# Altium PCB PCB1.PcbDoc
Units mil, origin at the board's own origin, x right, y up, seen from the top; angles counter-clockwise.
Board outline 2850 x 3370 mil, 2 copper layers (Top Layer, Bottom Layer); 20 components, 14 nets, 84 pads, 4 vias.
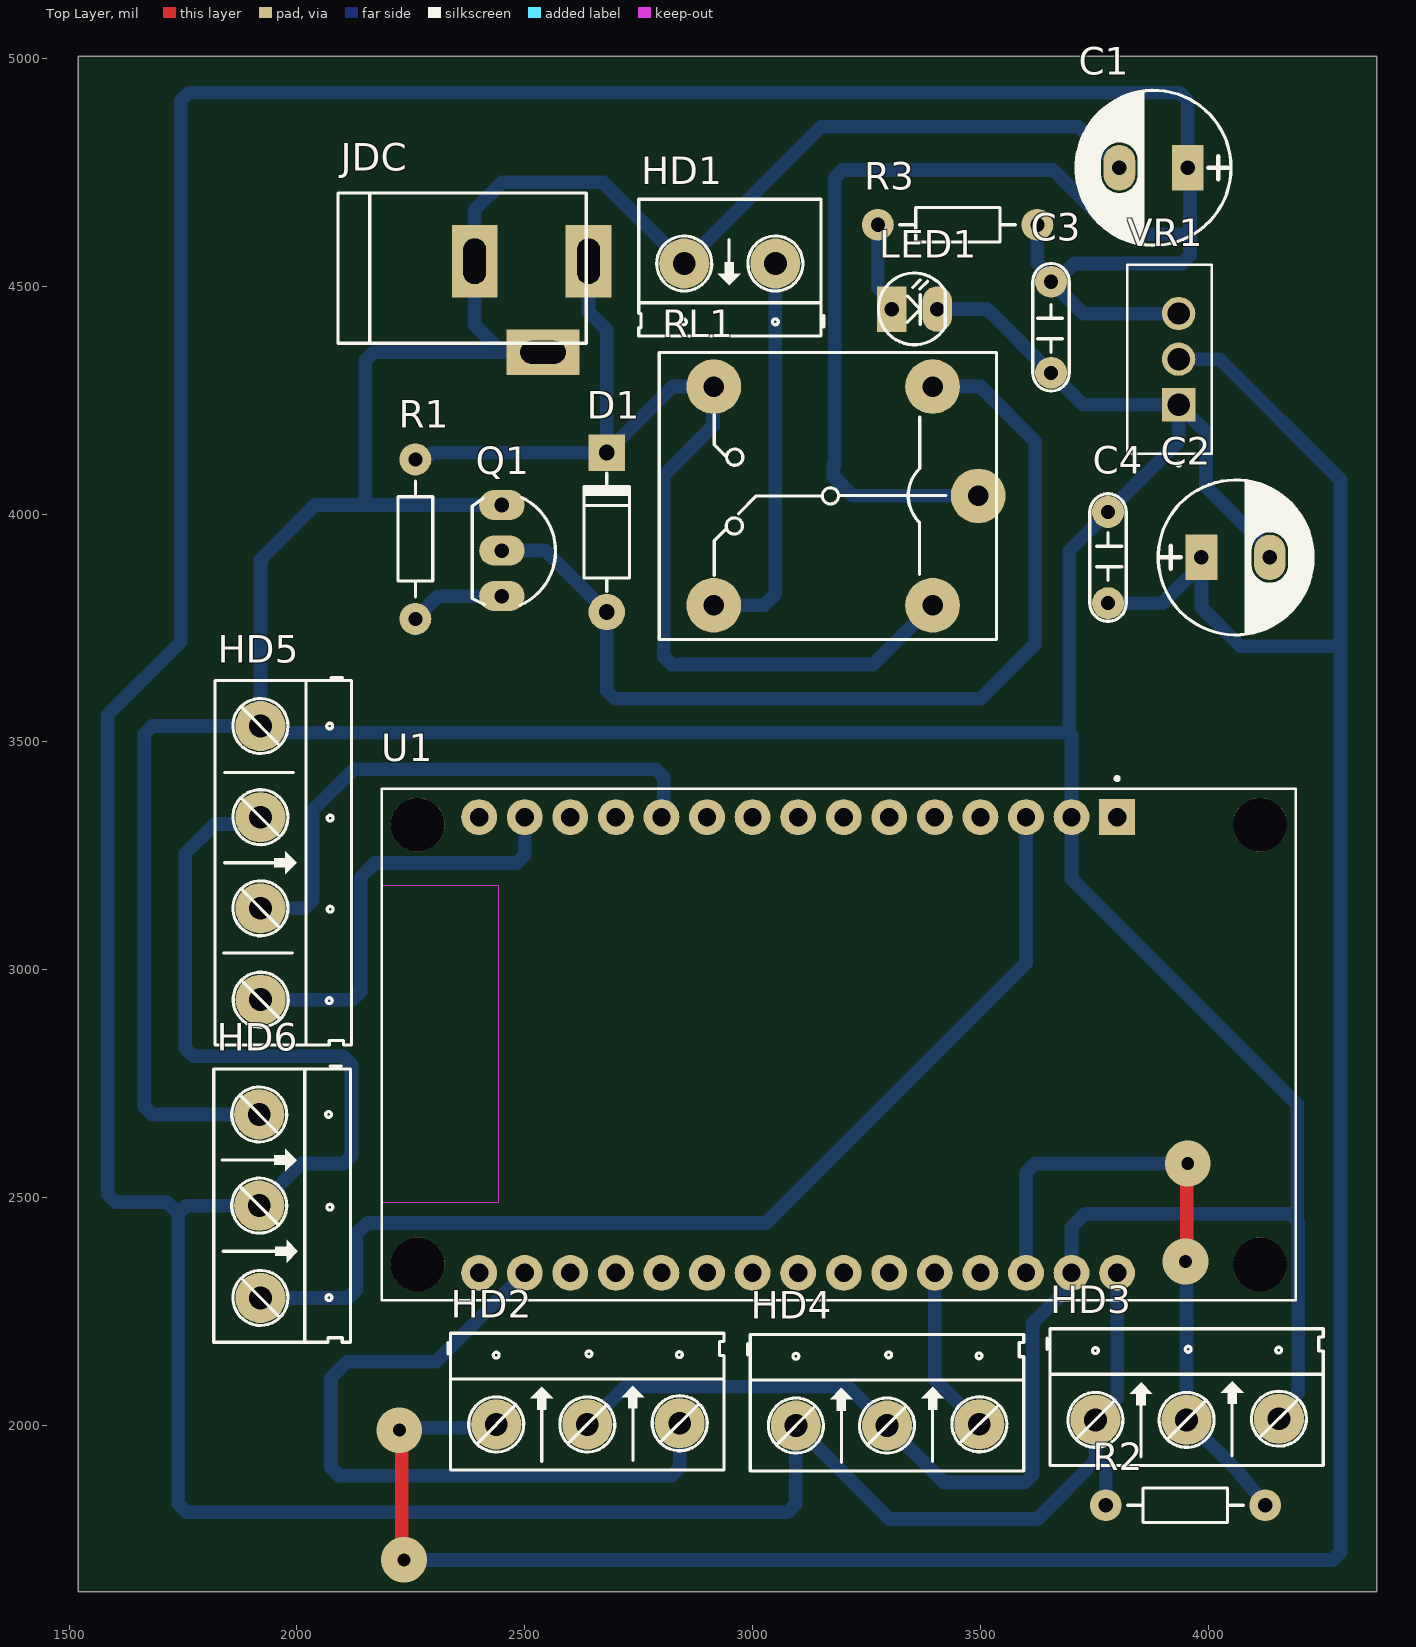
[diagram p0: Top Layer view]
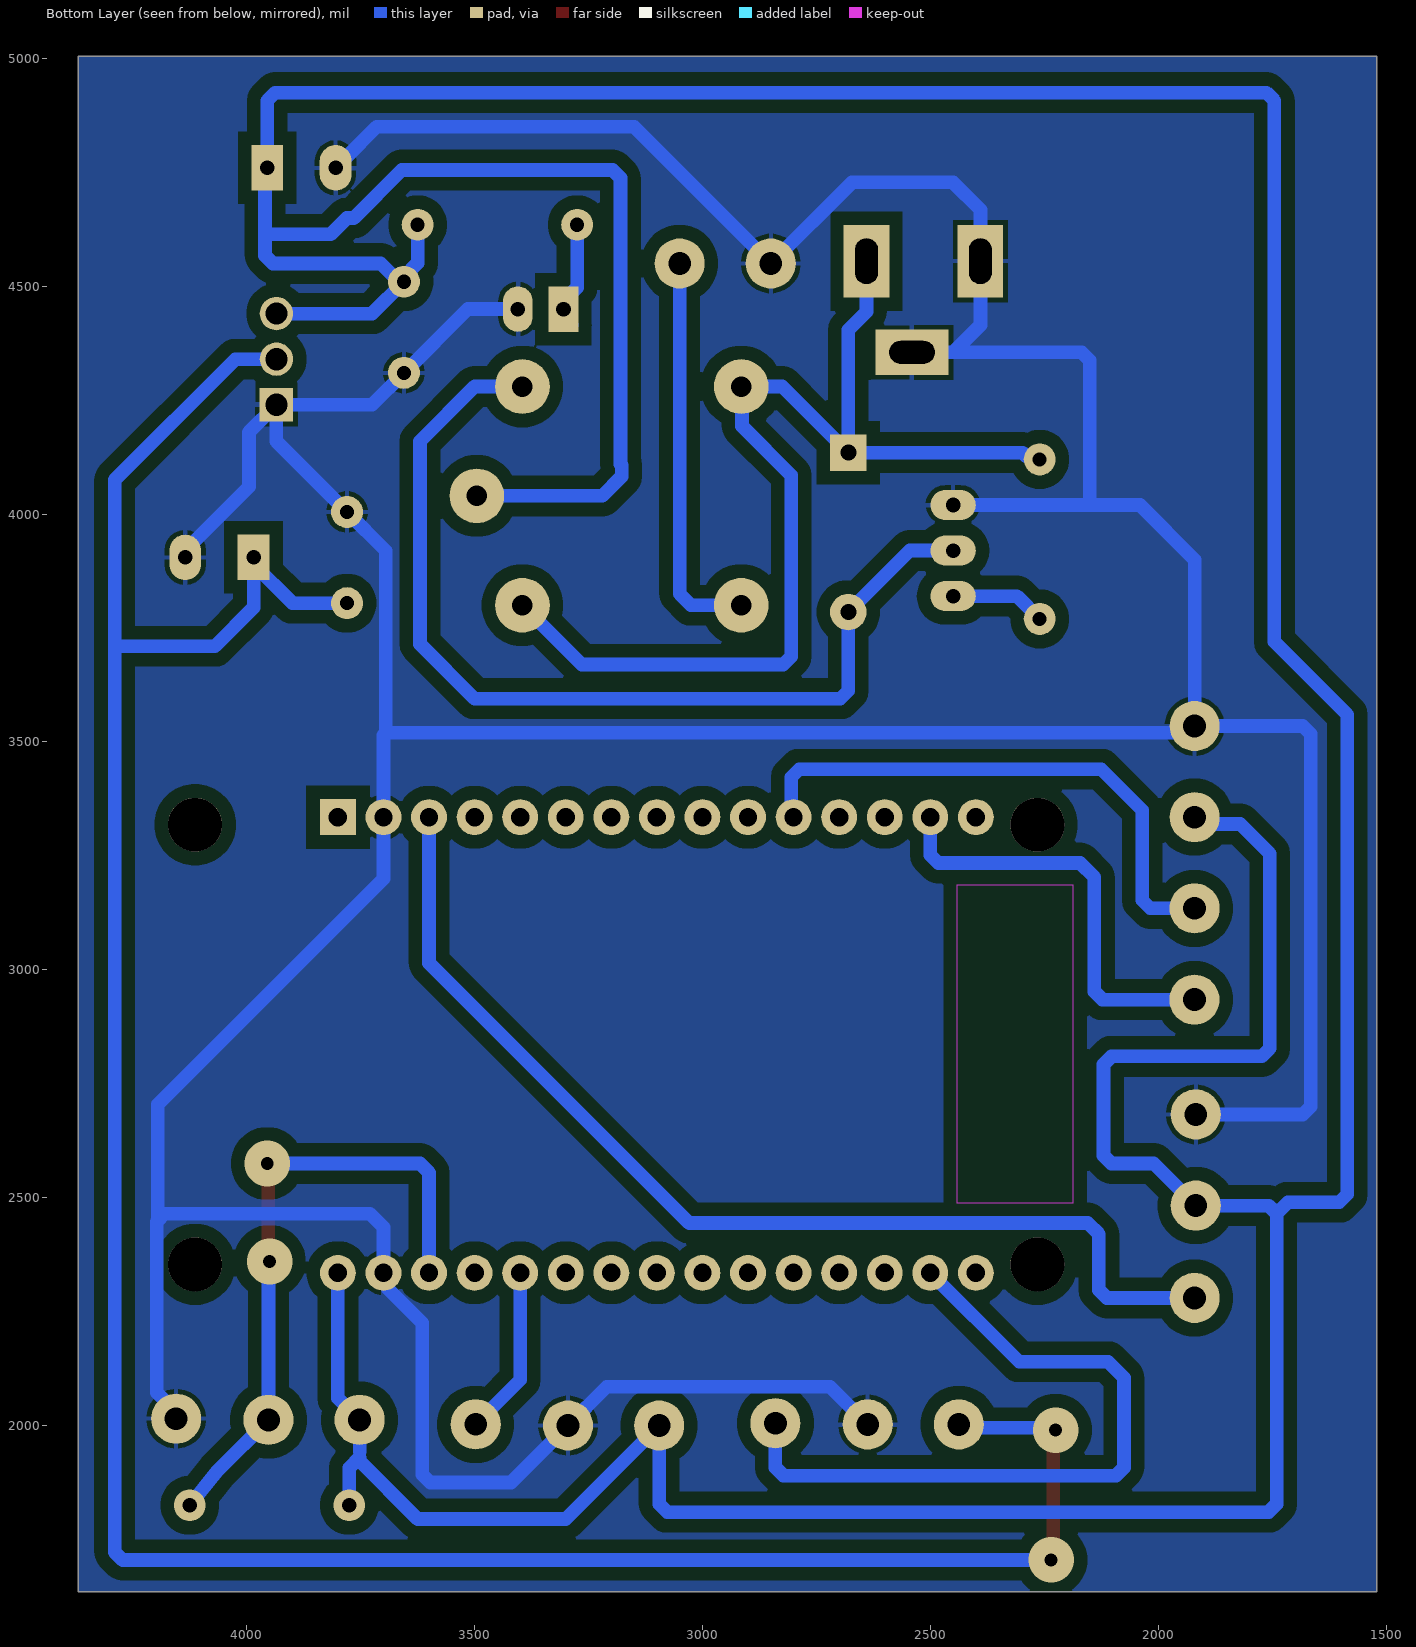
[diagram p1: Bottom Layer view, seen from below]
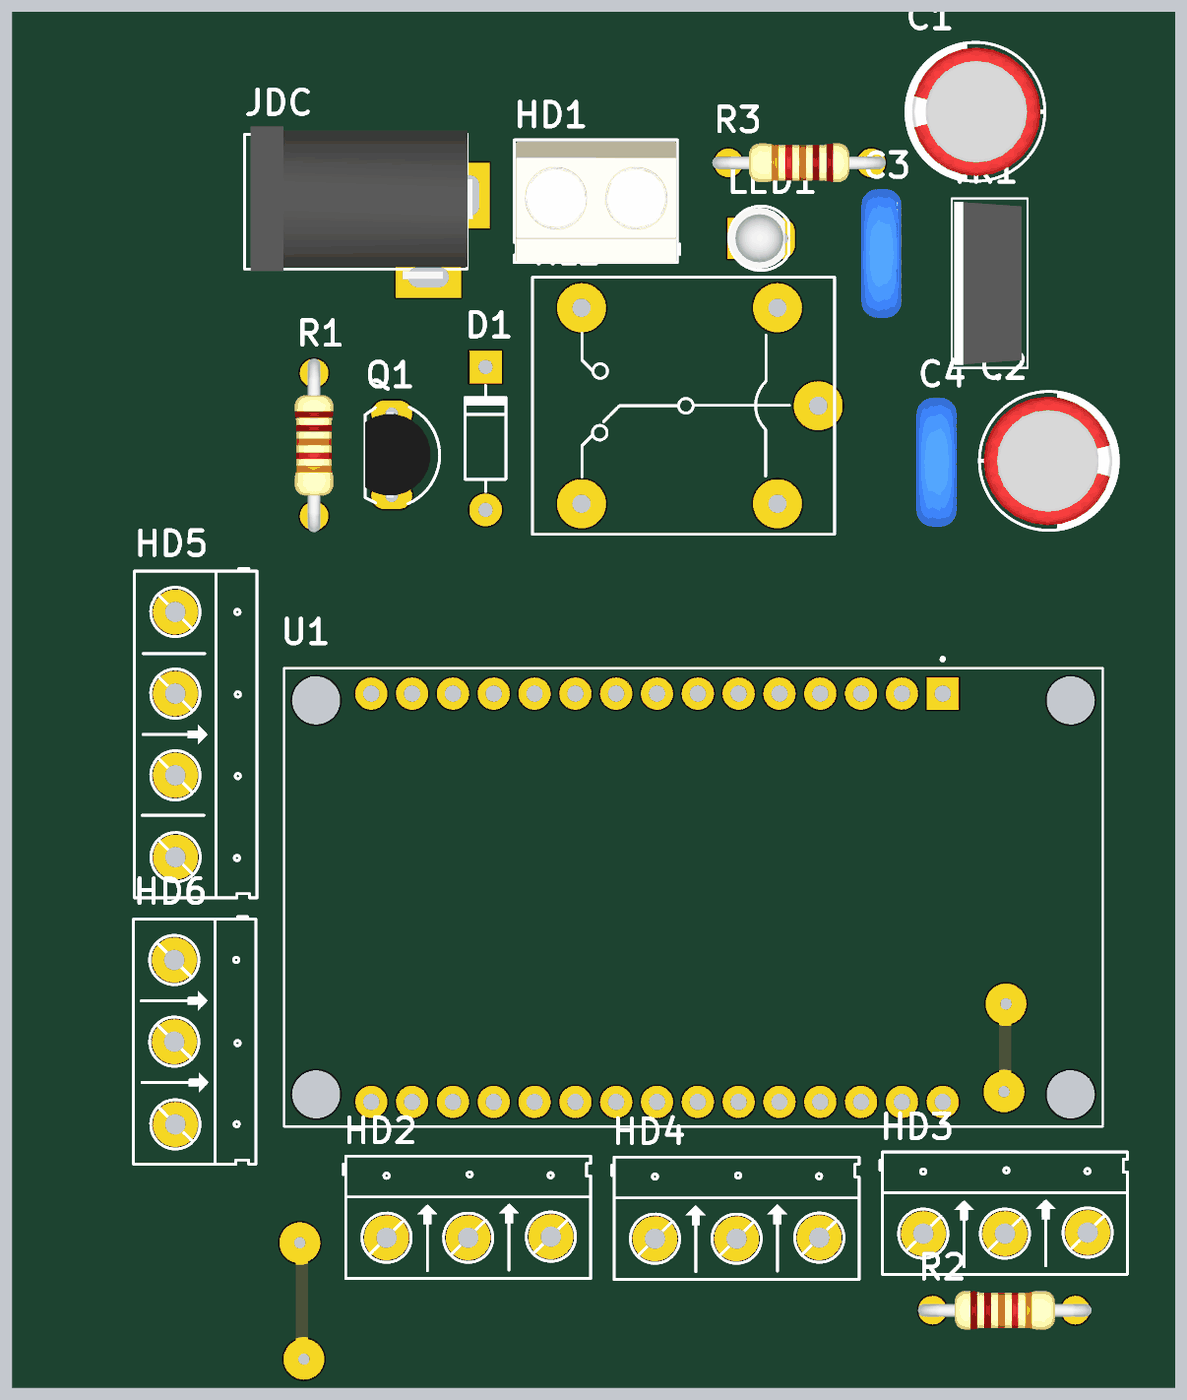
[diagram p2: 3D render of the assembled board from above, using the file's embedded part models]

## Layer stack, top to bottom
Top Solder: solder mask 0.4, Solder Resist, Dk 3.5
Top Layer: signal copper 1.4
Dielectric 1: dielectric 12.6, FR-4, Dk 4.8
Bottom Layer: signal copper 1.4
Bottom Solder: solder mask 0.4, Solder Resist, Dk 3.5

## Board outline
1520,1635 4370,1635 4370,5005 1520,5005

## Design rules (kind name [scope] priority, off if disabled: settings)
Clearance [All] p1: gap=10 ignorepadtopadclearanceinfootprint=FALSE except(0: Arc-Hole Track-Hole SMDPad-Hole THPad-Hole Via-Hole Fill-Hole Poly-Hole Region-Hole Text-Hole; 30: Arc-Fill Arc-Poly Arc-Region Track-Fill Track-Poly Track-Region SMDPad-Fill SMDPad-Poly SMDPad-Region THPad-Fill THPad-Poly THPad-Region Via-Fill Via-Poly Via-Region Fill-Fill Fill-Poly Fill-Region Poly-Poly Poly-Region Region-Region)
PolygonConnect [All] p1: connectstyle=Relief reliefconductorwidth=10 reliefentries=4 polygonreliefangle="90 Angle" airgapwidth=10
RoutingVias [All] p1: holewidth=28 width=50 viastyle="Through Hole" minholewidth=28 minwidth=50 maxholewidth=28 maxwidth=50
SolderMaskExpansion [All] p1: expansion=4 istentingtop=FALSE
Width [All] p1: maxlimit=180 minlimit=28 preferedwidth=30
30 further rules are at their usual default settings.

## Components (designator, comment, footprint, x,y, rotation, side; value= is the part's Value field where it differs from the comment)
C1 "100uF/35V" CP1.5/3.4 3955,4760 r180 top value=100uF/35V/50V
C2 "100uF/35V" CP1.5/3.4 3985,3905 r0 top value=100uF/35V/50V
C3 "104" CN2 3655,4310 r90 top value=0.1uF
C4 "104" CN2 3780,4004.69 r270 top value=0.1uF
D1 "1N4007" D1A 2680,3785 r270 top
HD1 "Header 2" HED2 3050,4550 r180 top
HD2 "Header 3" HED3 2437.38,2002.38 r0 top
HD3 "Header 3" HED3 3752.38,2012.38 r0 top
HD4 "Header 3" HED3 3095,2000 r0 top
HD5 "Header 4" HED4 1920,3535 r270 top
HD6 "Header 3" HED3 1917.38,2682.62 r270 top
JDC "Jac DC" DC-IN 2515,4455 r0 top
LED1 "LED" LED-3 3305,4450 r0 top value="LED 3 ly Single Colour"
Q1 "C1815" QTO-92 2450,3920 r270 top
R1 "3.3k" R1/4W 2260,3770 r90 top value="R1/4W - 1K"
R2 "4.7k" R1/4W 4125,1825 r180 top value="R1/4W - 1K"
R3 "330R" R1/4W 3275,4635 r0 top value="R1/4W - 1K"
RL1 "Relay 10A/12V" RL_SPDT_10A 3495,4040 r180 top value="Relay SPDT, 10A, 12V"
U1 "ESP32-DEVKIT-V1" MODULE_ESP32_DEVKIT_V1 3189.17,2835 r270 top
VR1 "LM1117T-3.3/NOPB" TO254P1054X470X1955-3 3935,4340 r90 top

## Footprints (in the part's own frame and the unit in brackets; to place one, negate y for a bottom-side part, rotate by r counter-clockwise, add the part's x,y. Pads: shape width x height; smd on the part's side, far side on the other; paste and mask are expansions set on the pad)
CN2 [mil]
  round 70 hole 31: 1(0,0) 2(200,0)
  silkscreen extent -40,-40 240,40, body extent -54,-44 260,55, height 407
CP1.5/3.4 [mil] "Tu hoa 220->470uF,16V, 470uF/16V,25V"
  rect 70x100 hole 32: 1(0,0)
  oval 70x100 hole 32: 2(150,0)
  silkscreen extent -95,-170 245,170, body extent -85,-157 230,157, height 446
D1A [mil] "Diode 1A, W 100mil, L 350mil"
  round 80 hole 35: 1(0,0)
  rect 80x80 hole 35: 2(-350,0)
  silkscreen extent -305,-50 -45,50, body extent -366,-42 16,41, height 100
DC-IN [mil] "Jac DC input"
  rect 100x160 hole 50 slot 100 at 90 deg: 1(125,100) 2(-125,100)
  rect 160x100 hole 50 slot 100 at 0 deg: 3(25,-100)
  silkscreen extent -425,-80 120,250, body extent -410,-105 134,269, height 434
HED2 [mil] "Header 2, 2 pin, hight 300mil, Pin to Pin 200, Colour Green"
  round 110 hole 50: 1(0,0) 2(200,0)
  silkscreen extent -106,-141 300,159, body extent -98,-136 296,159, height 394
HED3 [mil] "Header 3, 3 pin, hight 300mil, Pin to Pin 200, Colour Green"
  round 110 hole 50: 1(0,0) 2(200,0) 3(402.62,2.62)
  silkscreen extent -106,-100 500,200
HED4 [mil] "Header 4, 4 pin, hight 300mil, Pin to Pin 200, Colour Green"
  round 110 hole 50: 1(0,0) 2(200,0) 3(400.06,0.06) 4(600.39,0.39)
  silkscreen extent -106,-100 700,200
LED-3 [mil] "LED 2 PIN, 3ly Only colour"
  rect 65x100 hole 32: 1(0,0)
  oval 65x100 hole 32: 2(100,0)
  silkscreen extent -29,-78 118,79, body extent -29,-75 109,75, height 256
MODULE_ESP32_DEVKIT_V1 [mm]
  rect 2x2 / inner round 2 / far side rect 2x2 hole 1.02: 1(-12.7,15.515)
  round 2 hole 1.02: 2(-12.7,12.975) 3(-12.7,10.435) 4(-12.7,7.895) 5(-12.7,5.355) 6(-12.7,2.815) 7(-12.7,0.275) 8(-12.7,-2.265) 9(-12.7,-4.805) 10(-12.7,-7.345) 11(-12.7,-9.885) 12(-12.7,-12.425) 13(-12.7,-14.965) 14(-12.7,-17.505) 15(-12.7,-20.045) 16(12.7,-20.045) 17(12.7,-17.505) 18(12.7,-14.965) 19(12.7,-12.425) 20(12.7,-9.885) 21(12.7,-7.345) 22(12.7,-4.805) 23(12.7,-2.265) 24(12.7,0.275) 25(12.7,2.815) 26(12.7,5.355) 27(12.7,7.895) 28(12.7,10.435) 29(12.7,12.975) 30(12.7,15.515)
  round 3 hole 3 unplated: ""(-12.28,23.475) ""(-12.28,-23.475) ""(12.23,23.475) ""(12.23,-23.475)
  Keep-Out Layer region: 8.78,-25.475 -8.91,-25.475 -8.91,-18.985 8.78,-18.985
  Keep-Out Layer region: 8.78,-25.475 -8.91,-25.475 -8.91,-18.985 8.78,-18.985
  silkscreen extent -14.95,-25.48 14.23,25.48
QTO-92 [mil] "TO-92"
  oval 66x100 hole 32: 1(-100,0) 2(0,0) 3(100,0)
  silkscreen extent -117,-65 120,118, body extent -109,-66 109,95, height 385
R1/4W [mil] "R 1/4W, 2 Pin, 350mil"
  round 70 hole 31: 1(0,0) 2(350,0)
  silkscreen extent 48,-38 302,38, body extent -40,-47 386,47, height 111
RL_SPDT_10A [mil] "Relay SPDT, 5 pin, 10A,W 650mil, L 800mil, H 800mil"
  round 120 hole 45: 1(0,0) 2(580,240) 3(580,-240) 4(100,-240) 5(100,240)
  silkscreen extent -40,-315 700,315
TO254P1054X470X1955-3 [mm]
  rect 1.86x1.86 / inner round 1.86 / far side rect 1.86x1.86 hole 1.24: 1(-2.54,0)
  round 1.86 hole 1.24: 2(0,0) 3(2.54,0)
  silkscreen extent -5.94,-1.84 5.27,2.86, body extent -5.08,-1.49 5.08,2.71, height 22.86

## Part data
C1 C2: library part CP3, "Cap 100uF/35V - 470uF/16V", Description 1="1000uF/6,3V - 470uF/16V - 330uF - 25V", Description 2="220uF/35V - 100uF/50V - 63V - 4,7uF/200V", Description 3="22uF => 33uF100V - 3,3uF => 4,7uF/250V", Description 4="2,2uF =>3,3uF/350 - 2,2uF/400V - 1uF/450V"
C3 C4: library part CN2, "Cap np 104 => 105pF"
D1: library part D1A, "Diode 1A"
HD1: library part Hed2, "Header 2 (Green)"
HD2 HD3 HD4 HD6: library part Hed3, "Header 3 (Green)"
HD5: library part Hed4, "Header 4 (Green)"
JDC: library part DCIN, "Jac DC input"
LED1: "LED Single colour Green and Red"
Q1: "NPN 600mW, ECB"
R1 R2 R3: library part R1/4W, "Resistor 1/4W"
RL1: library part "Relay 1", "Relay SPDT,10A - 12VDC 5 Pin"
U1: "Dual core, Wi-Fi: 2.4 GHz up to 150 Mbits/s,BLE (Bluetooth Low Energy) and legacy Bluetooth, 32 bits, Up to 240 MHz", Package=None, Availability="Not in stock", Check_prices=https://www.snapeda.com/parts/ESP32-DEVKIT-V1/Do+it/view-part/?ref=eda, MF="Do it", MP=ESP32-DEVKIT-V1, Price=None, SnapEDA_Link=https://www.snapeda.com/parts/ESP32-DEVKIT-V1/Do+it/view-part/?ref=snap
VR1: "800-mA 15-V linear voltage regulator", Package="TO-220-3 Texas Instruments", Availability="In Stock", Check_prices=https://www.snapeda.com/parts/LM1117T-3.3/NOPB/Texas+Instruments/view-part/?ref=eda, MF="Texas Instruments", MP=LM1117T-3.3/NOPB, Price=None, Purchase-URL=https://pricing.snapeda.com/search/part/LM1117T-3.3/NOPB/?ref=eda, SnapEDA_Link=https://www.snapeda.com/parts/LM1117T-3.3/NOPB/Texas+Instruments/view-part/?ref=snap

## Via types
v1: diameter 100, hole 28, Top Layer to Bottom Layer, 4 vias

## Nets (pads, with @x,y where several pads share a name; then routed paths per layer and width w, separated by ;. In a path a pad name is that pad's centre, name@x,y a point inside that pad or via, vN(x,y) a via of type N, cw(c..) or ccw(c..) an arc to the next point about the centre after c; other vN are vias at no path point)
3.3V: C2.1 C4.2 HD2.1 VR1.2 | length 6078.7
  Top Layer w30: v1(2225,1990) 2230,1985 2230,1710 v1(2235,1705)
  Bottom Layer w30: v1@2230,1995 2430,1995 HD2.1 ; v1(2235,1705) 4272.43,1705 4290,1722.57 4290,3705 ; C4.2@3785,3809.69 C4.2 3899.69,3804.69 C2.1@3985,3890 ; VR1.2 4025,4340 4290,4075 4290,3705 ; C2.1 C2.1@3985,3890 ; C2.1@3985,3890 3985,3795 4070,3710 4285,3710 4290,3705
5V: C1.1 C3.2 HD3.1 HD4.1 HD5.2 HD6.2 R2.2 R3.2 RL1.1 U1.30 VR1.3 | length 12961.1
  Bottom Layer w30: HD5.2 1905,3320 1820,3320 1755,3255 1755,2827.57 1772.57,2810 2102.43,2810 2120,2792.43 2120,2592.57 2102.43,2575 2009.76,2575 HD6.2 1757.57,2482.62 1740,2465.05 ; RL1.1 3220,4040 3177.43,4082.57 3177.43,4107.43 3180,4110 3180,4737.43 3197.57,4755 3660,4755 3765,4650 3780,4650 3816.17,4613.83 3960,4613.83 ; R3.2 3625,4550.82 3655,4520.82 C3.2 ; 3752.38,1929.62 3775,1907 R2.2 ; 3752.38,1942.38 HD3.1 3800,2060 U1.30 ; 3756,1926 3625,1795 3300,1795 HD4.1 3095,1827.57 3077.43,1810 1757.57,1810 1740,1827.57 1740,2465.05 ; VR1.3 3725,4440 C3.2 ; 1740,2465.05 1715.05,2490 1602.57,2490 1585,2507.57 1585,3560 1745,3720 1745,4907.43 1762.57,4925 3937.43,4925 3955,4907.43 C1.1 3960,4755 3960,4613.83 ; C3.2 3665.82,4510 3705.82,4550 3942.43,4550 3960,4567.57 3960,4613.83
GND: C1.2 C2.2 C3.1 C4.1 HD1.2 HD2.2 HD3.3 HD4.2 HD5.1 HD6.1 JDC.2 JDC.3 LED1.2 Q1.1 U1.2 U1.29 VR1.1 | length 12592.6
  Bottom Layer w30: HD6.1 1682.57,2682.62 1665,2700.19 1665,3517.43 1682.57,3535 HD5.1 ; Q1.1 2150,4020 ; JDC.3 2450,4355 ; HD2.2 2720,2085 3210,2085 HD4.2 3420,1875 3597.43,1875 3615,1892.57 3615,2225 3690.67,2300.67 3690.67,2325.67 U1.29 3700,2435 3730,2465 4179.87,2465 4195,2449.87 ; LED1.2 3515,4450 C3.1 3725,4240 VR1.1 ; C1.2 3805,4764.18 3786.52,4782.65 3782.35,4782.65 3715,4850 3150,4850 HD1.2 2672,4728 2450,4728 2390,4668 JDC.2 2390,4415 2450,4355 ; C2.2@4135,3890 C2.2 4135,3920 3995,4060 3995,4180 VR1.1 ; HD3.3 4155,2030.13 4197.44,2072.57 4197.44,2447.43 4195,2449.87 ; HD5.1 1920,3900 2040,4020 2150,4020 ; HD5.1 1935,3520 3695,3520 ; 2150,4020 2150,4337.43 2167.57,4355 2450,4355 ; 3695,3520 3695,3919.69 C4.1 3935,4159.69 VR1.1 ; 3695,3520 3700,3515 U1.2 3700,3200 4195,2705 4195,2449.87
GPIO13: HD3.2 R2.1 U1.28 | length 1404.1
  Top Layer w30: v1(3950,2360) 3952.5,2362.5 3952.5,2572.5 v1(3955,2575)
  Bottom Layer w30: U1.28 3600,2555 3620,2575 v1(3955,2575) ; v1(3950,2360) 3952.38,2357.62 HD3.2 4064.76,1900 R2.1
GPIO14: HD4.3 U1.26 | length 372.8
  Bottom Layer w30: U1.26 3400,2100.24 HD4.3
GPIO36: HD2.3 U1.17 | length 1594.7
  Bottom Layer w30: U1.17 2305,2140 2110,2140 2075,2105 2075,1907.57 2092.57,1890 2822.43,1890 2840,1907.57 HD2.3
NetD1_1: D1.1 Q1.2 RL1.4 | length 2175
  Bottom Layer w30: Q1.2 2545,3920 D1.1 2680,3612.57 2697.57,3595 3500,3595 3620,3715 3620,4160 3500,4280 RL1.4
NetD1_2: D1.2 JDC.1 R1.2 RL1.3 RL1.5 | length 2447
  Bottom Layer w30: R1.2 2267.65,4127.65 2290.23,4127.65 2297.57,4135 D1.2 ; JDC.1 2640,4444 2680,4404 D1.2 ; RL1.5 3265,3670 2822.57,3670 2805,3687.57 2805,4085 2913.25,4193.25 2913.25,4278.25 RL1.3 2825,4280 D1.2
NetHD1_1: HD1.1 RL1.2 | length 870.4
  Bottom Layer w30: RL1.2 3025,3800 3050,3825 HD1.1
NetLED1_1: LED1.1 R3.1 | length 239.7
  Bottom Layer w30: R3.1 3275,4497.5 3305,4467.5 LED1.1 3305,4432.5 LED1.1@3287.5,4415
NetQ1_3: Q1.3 R1.1 | length 210.7
  Bottom Layer w30: R1.1 2310,3820 Q1.3
PWM: HD6.3 U1.3 | length 2376.2
  Bottom Layer w30: HD6.3 2112.43,2280 2130,2297.57 2130,2420 2154.33,2444.33 3029.33,2444.33 3600,3015 U1.3
SCL: HD5.4 U1.14 | length 941.1
  Bottom Layer w30: HD5.4 2122.43,2934.61 2140,2952.18 2140,3203.21 2171.2,3234.41 2482.43,3234.41 2500,3251.98 U1.14
SDA: HD5.3 U1.11 | length 1223.8
  Bottom Layer w30: HD5.3 2017.43,3134.94 2035,3152.51 2035,3350 2125,3440 2787.43,3440 2805,3422.43 2805,3340 U1.11
pads on no net: U1. U1.1 U1.4 U1.5 U1.6 U1.7 U1.8 U1.9 U1.10 U1.12 U1.13 U1.15 U1.16 U1.18 U1.19 U1.20 U1.21 U1.22 U1.23 U1.24 U1.25 U1.27

## Polygon pours and split planes (outlines as drawn)
GND on Bottom Layer "NONET_L-01_P-001" (solid, pour order 8): 1520,5005 4370,5005 4370,1635 1520,1635